# Altium PCB PCB1.PcbDoc
Units mm, origin at the board's own origin, x right, y up, seen from the top; angles counter-clockwise.
Board outline 38 x 21.7 mm, 2 copper layers (Top Layer, Bottom Layer); 45 components, 33 nets, 183 pads, 30 vias.
Unrouted connection lines stored in the file: 2.
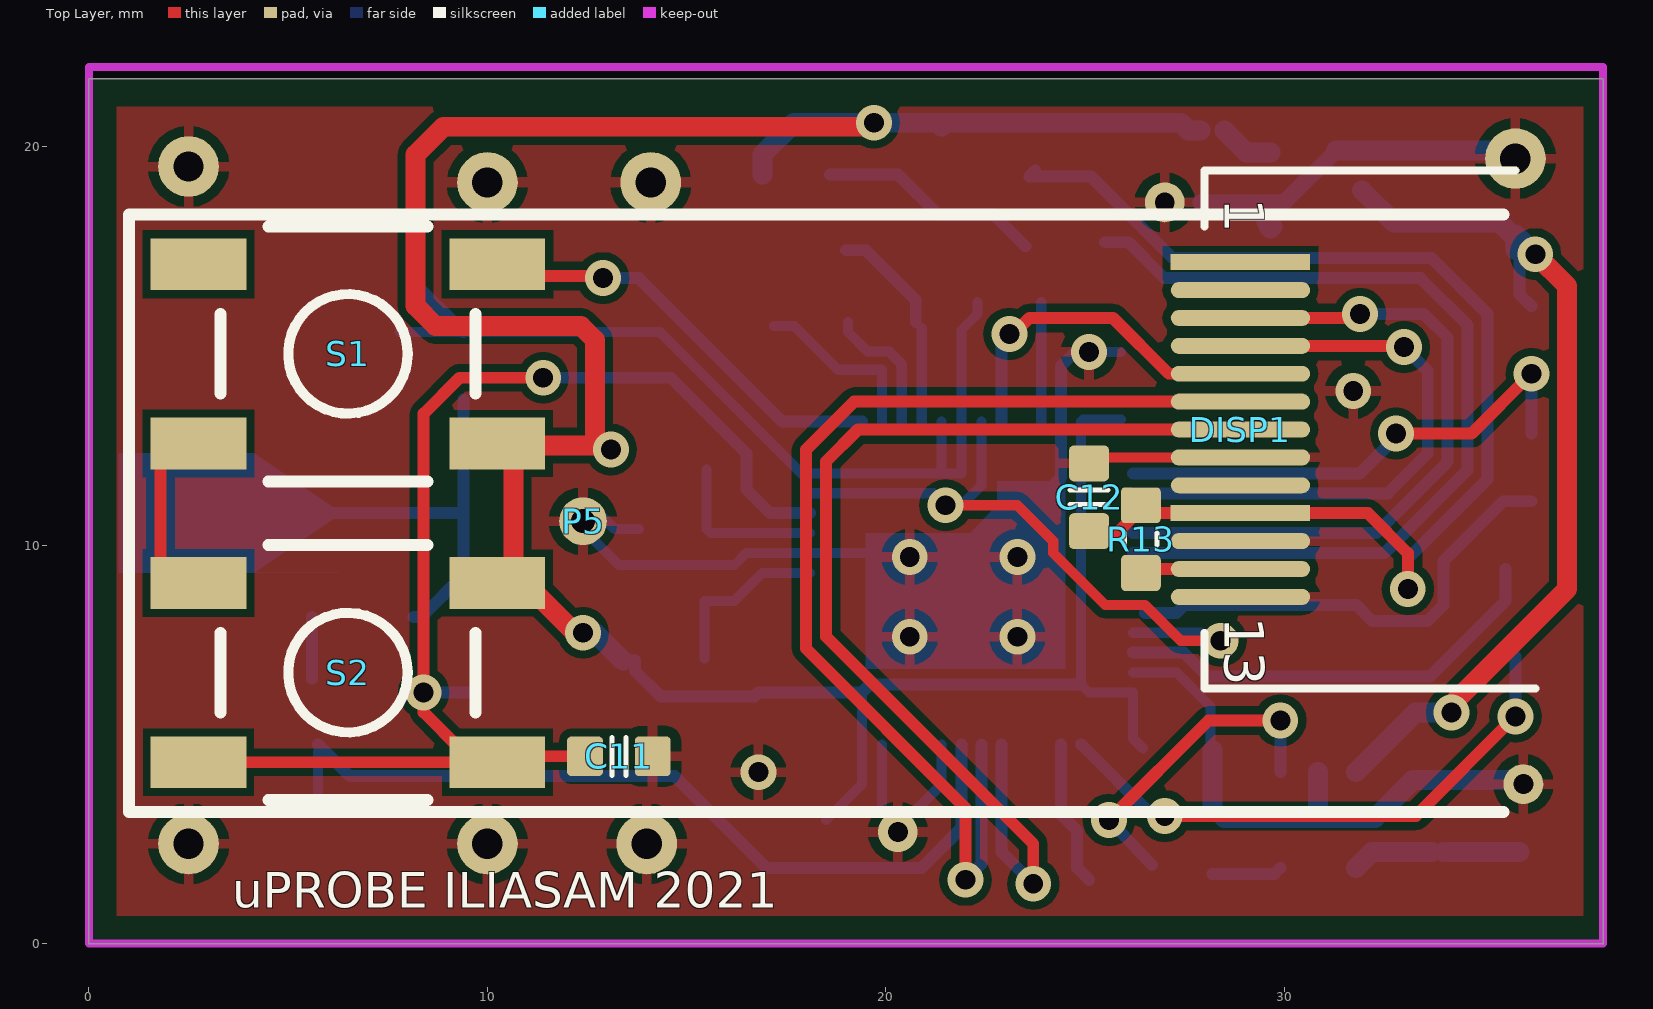
[diagram p0: Top Layer view]
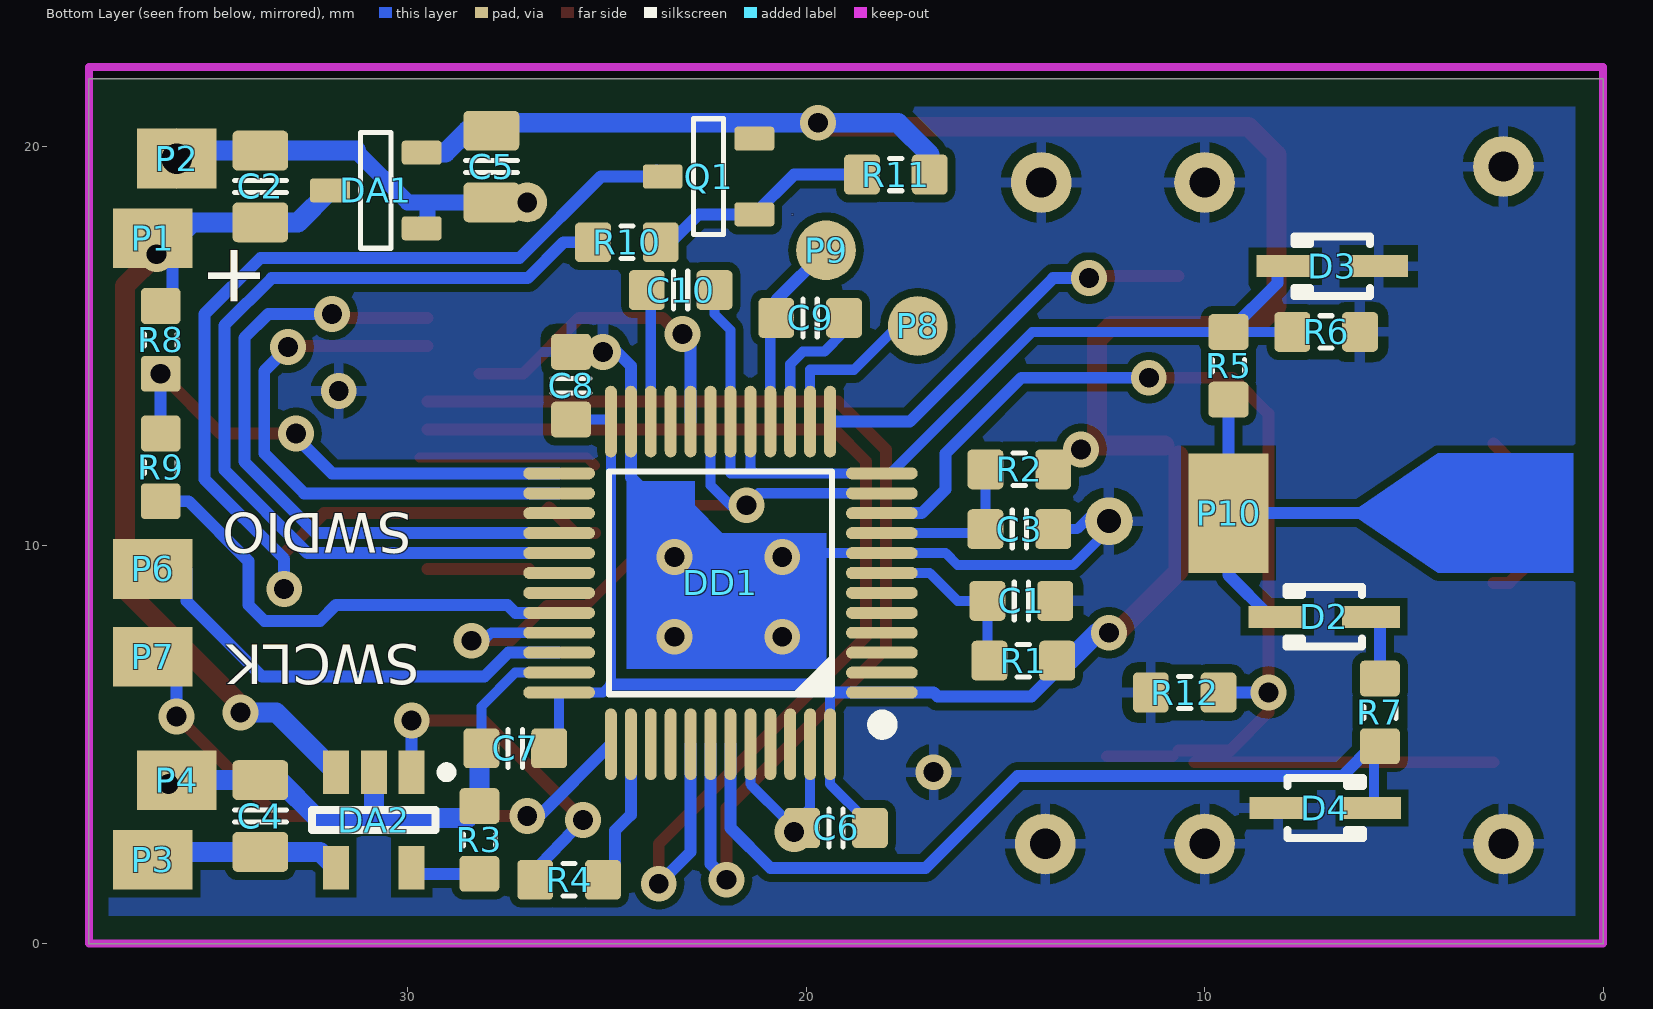
[diagram p1: Bottom Layer view, seen from below]
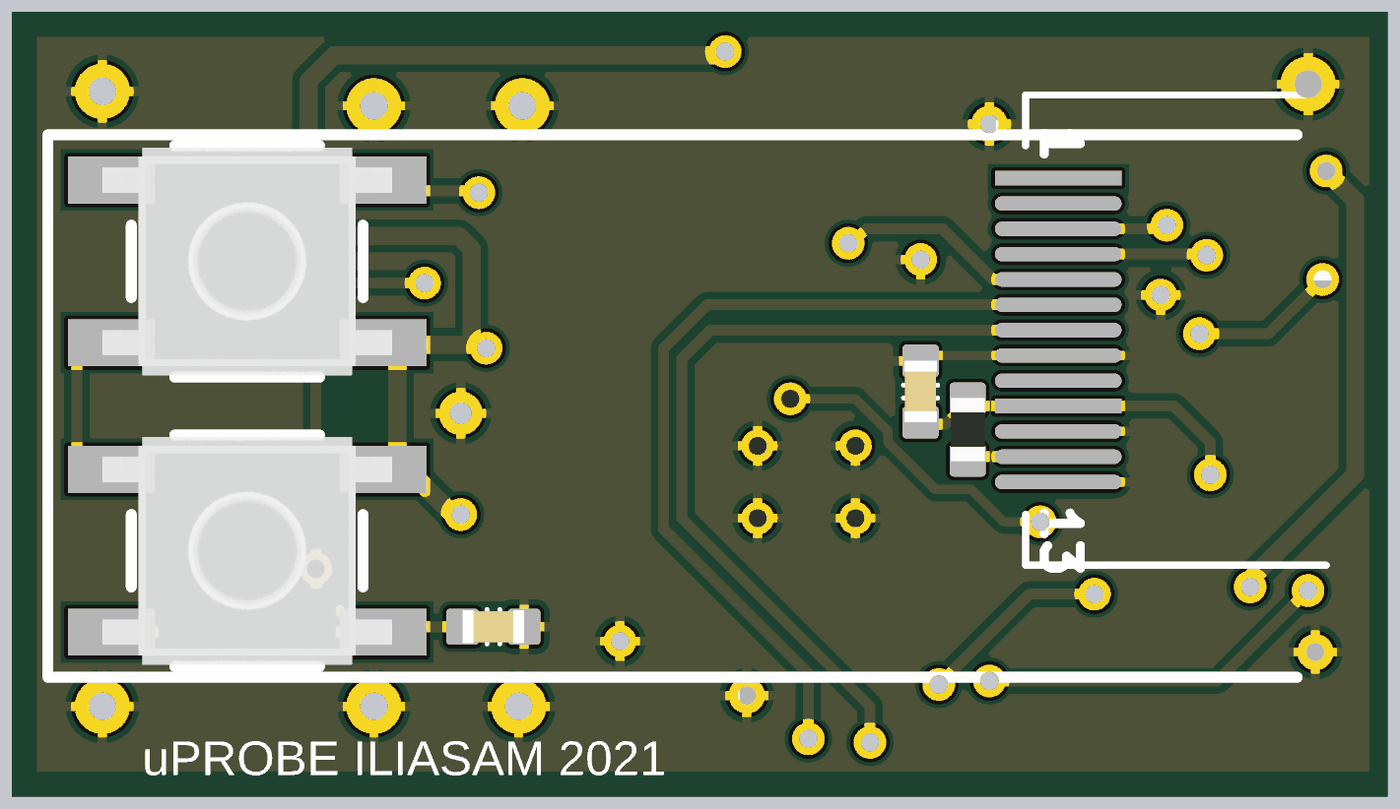
[diagram p2: 3D render of the assembled board from above, using the file's embedded part models]
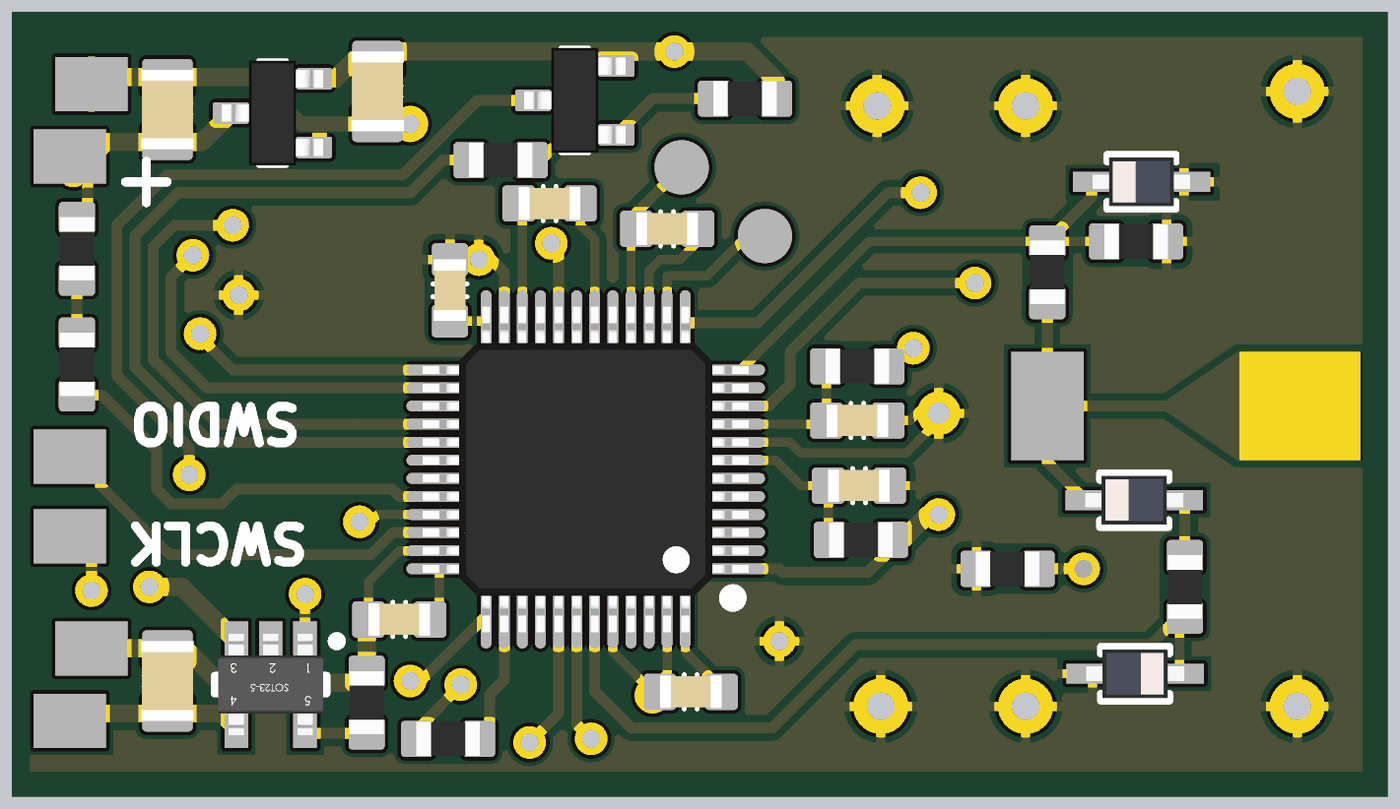
[diagram p3: 3D render of the assembled board from below, using the file's embedded part models]

## Layer stack, top to bottom
Top Solder: solder mask 0.0102, Solder Resist, Dk 3.5
Top Layer: signal copper 0.0356
Dielectric 1: dielectric 0.32, FR-4, Dk 4.8
Bottom Layer: signal copper 0.0356
Bottom Solder: solder mask 0.0102, Solder Resist, Dk 3.5

## Board outline
0,0 38,0 38,21.7 0,21.7

## Design rules (kind name [scope] priority, off if disabled: settings)
Clearance [All] p1: gap=0.2
ComponentClearance [All] p1: gap=0.2 collisioncheckmode=3 verticalgap=0.254 showdistances=FALSE
HoleSize [All] p1: absolutevalues=TRUE maxlimit=10 minlimit=0.3 maxpercent=80.000 minpercent=20.000
PolygonConnect [All] p1: connectstyle=Relief reliefconductorwidth=0.254 reliefentries=4 polygonreliefangle="90 Angle" airgapwidth=0.254
RoomDefinition Sheet1 [InComponentClass('Sheet1')] p1: confinementstyle=ConfineIn formatcopy=TRUE lockcomponents=FALSE outline -18.286,-22.225 40.769,-22.225 40.769,-10.541 -18.286,-10.541
RoutingVias [All] p1: holewidth=0.5 width=0.9 viastyle="Through Hole" minholewidth=0.4 minwidth=0.7 maxholewidth=10 maxwidth=12
SilkToSilkClearance [All] p1: silktosilkclearance=0.1
SolderMaskExpansion [All] p1: expansion=0.102
Width [All] p1: maxlimit=10 minlimit=0.2 preferedwidth=0.3
27 further rules are at their usual default settings.

## Components (designator, comment, footprint, x,y, rotation, side; value= is the part's Value field where it differs from the comment)
C1 "100nF" CAPC1608X90N 14.6,8.6 r0 bottom
C2 "2.2uF" CAPC2012X135N 33.7,19 r90 bottom
C3 "100nF" CAPC1608X90N 14.65,10.4 r0 bottom
C4 "4.7uF" CAPC2012X135N 33.7,3.2 r270 bottom
C5 "1uF" CAPC2012X135N 27.9,19.5 r90 bottom
C6 "100nF" CAPC1608X90N 19.25,2.9 r180 bottom
C7 "100nF" CAPC1608X90N 27.3,4.9 r180 bottom
C8 "100nF" CAPC1608X90N 25.9,14 r270 bottom
C9 "10pF" CAPC1608X90N 19.9,15.7 r180 bottom
C10 "22nF" CAPC1608X90N 23.15,16.4 r0 bottom
C11 "100nF" CAPC1608X90N 13.3,4.7 r0 top
C12 "100nF" CAPC1608X90N 25.1,11.2 r90 top
D2 "pmeg4005aea" SOD-323F/SC-90_INV 7,8.2 r180 bottom
D3 "BZX384-C4V7.115" SOD-323F/SC-90_INV 6.8,17 r180 bottom
D4 "pmeg4005aea" SOD-323F/SC-90_INV 6.975,3.4 r0 bottom
DA1 "MCP1702T" SOT23-3 30.8,18.9 r0 bottom
DA2 "MCP73831" SOT23-5 30.85,3.1 r270 bottom
DD1 "STM32F303CBT6" LQFP-48_N 22.15,9.05 r0 bottom locked
DISP1 "LCD 160x80" LCD_160_80 28.9,17.1 r270 top
P1 "PWR" EXT_PAD_2 37.9,17.7 r90 bottom
P2 "GND" EXT_PAD_2 34.3,19.7 r270 bottom
P3 "EXT_PWR" EXT_PAD_2 34.9,2.1 r270 bottom
P4 "GND" EXT_PAD_2 34.3,4.1 r270 bottom
P5 "AGND" EXT_HOLE 12.4,10.6 r0 top
P6 "Pad" EXT_PAD_2 34.9,9.4 r270 bottom
P7 "Pad" EXT_PAD_2 34.9,7.2 r270 bottom
P8 "DAC1" EXT_PAD_SMALL 17.2,17 r180 bottom
P9 "Pad" EXT_PAD_SMALL 19.5,18.9 r180 bottom
P10 "SIGNAL" EXT_PAD 9.4,9.3 r0 bottom
Q1 "IRLML6402" SOT23-3 22.45,19.25 r0 bottom
R1 "10K" RESC1608X55N 14.55,7.1 r0 bottom
R2 "100" RESC1608X55N 14.65,11.9 r180 bottom
R3 "2K" RESC1608X55N 28.2,2.6 r90 bottom
R4 "2K" RESC1608X55N 25.95,1.6 r0 bottom
R5 "100K" RESC1608X55N 9.4,14.5 r90 bottom
R6 "10K" RESC1608X55N 6.95,15.35 r180 bottom
R7 "1K" RESC1608X55N 5.6,5.8 r270 bottom
R8 "100K" RESC1608X55N 36.2,15.15 r270 bottom
R9 "100K" RESC1608X55N 36.2,11.95 r270 bottom
R10 "1K" RESC1608X55N 24.5,17.6 r180 bottom
R11 "100K" RESC1608X55N 17.75,19.3 r180 bottom
R12 "10K" RESC1608X55N 10.5,6.3 r0 bottom
R13 "82" RESC1608X55N 26.4,10.15 r270 top
S1 "SWT-6" BUTTON_B3FS 6.5,14.8 r180 top locked
S2 "SWT-6" BUTTON_B3FS 6.5,6.8 r0 top locked

## Footprints (in the part's own frame and the unit in brackets; to place one, negate y for a bottom-side part, rotate by r counter-clockwise, add the part's x,y. Pads: shape width x height; smd on the part's side, far side on the other; paste and mask are expansions set on the pad)
BUTTON_B3FS [mm] "Button with 4 pins"
  rect 2.4x1.3 smd: 1(-3.75,2.25) 2(-3.75,-2.25) 3(3.75,-2.25) 4(3.75,2.25)
  silkscreen extent -3.2,-3.2 3.2,3.2, body extent -4,-3.15 4,3.15, height 5.6
CAPC1608X90N [mm] "Chip Capacitor, Body 1.6x0.8mm, EIA 0603, IPC Medium Density"
  round 0.254 on Mech15: 0(0,0)
  rrect25% 0.9x1 smd: 1(-0.85,0) 2(0.85,0)
  Top Layer pour cut-out: -0.6,0.5 -0.4,0.7 0.4,0.7 0.6,0.5 0.6,-0.5 0.4,-0.7 -0.4,-0.7 -0.6,-0.5
  silkscreen extent -0.18,-0.48 0.18,0.48, body extent -0.85,-0.45 0.85,0.45, height 0.89
CAPC2012X135N [mm] "Chip Capacitor, Body 2.0x1.2mm, EIA 0805, IPC Medium Density"
  round 0.254 on Mech15: 0(0,0)
  rrect25% 1x1.4 smd: 1(-0.9,0) 2(0.9,0)
  Top Layer pour cut-out: -0.675,0.7 -0.475,0.9 0.475,0.9 0.675,0.7 0.675,-0.7 0.475,-0.9 -0.475,-0.9 -0.675,-0.7
  silkscreen extent -0.15,-0.65 0.15,0.65, body extent -1.1,-0.72 1.1,0.73, height 1.34
EXT_HOLE [mm] "Hole for wire (0.6)"
  round 1.2 hole 0.6: 1(0,0)
EXT_PAD [mm] "Pad for wire(3x2)"
  rect 2x3 smd: 1(0,-1.5)
EXT_PAD_2 [mm] "Pad for wire(1.5x2)"
  rect 1.5x2 smd: 1(0,-1.5)
EXT_PAD_SMALL [mm] "Pad for wire(1.5mm round)"
  round 1.5 smd: 1(0,-1.5)
LCD_160_80 [mm]
  rect 0.4x3.5 smd: 1(0,0) 10(6.3,0)
  oval 0.4x3.5 smd: 2(0.7,0) 3(1.4,0) 4(2.1,0) 5(2.8,0) 6(3.5,0) 7(4.2,0) 8(4.9,0) 9(5.6,0) 11(7,0) 12(7.7,0) 13(8.4,0)
  silkscreen extent -2.3,-0.9 10.7,7.4
LQFP-48_N [mm] "Thin QFP, 48-Leads, Body 7x7mm, Pitch 0.5mm, IPC Medium Density"
  round 1 on Mech15: 0(0,0)
  oval 1.8x0.3 smd: 1(-4.05,2.75) 2(-4.05,2.25) 3(-4.05,1.75) 4(-4.05,1.25) 5(-4.05,0.75) 6(-4.05,0.25) 7(-4.05,-0.25) 8(-4.05,-0.75) 9(-4.05,-1.25) 10(-4.05,-1.75) 11(-4.05,-2.25) 12(-4.05,-2.75) 25(4.05,-2.75) 26(4.05,-2.25) 27(4.05,-1.75) 28(4.05,-1.25) 29(4.05,-0.75) 30(4.05,-0.25) 31(4.05,0.25) 32(4.05,0.75) 33(4.05,1.25) 34(4.05,1.75) 35(4.05,2.25) 36(4.05,2.75)
  oval 0.3x1.8 smd: 13(-2.75,-4.05) 14(-2.25,-4.05) 15(-1.75,-4.05) 16(-1.25,-4.05) 17(-0.75,-4.05) 18(-0.25,-4.05) 19(0.25,-4.05) 20(0.75,-4.05) 21(1.25,-4.05) 22(1.75,-4.05) 23(2.25,-4.05) 24(2.75,-4.05) 37(2.75,4.05) 38(2.25,4.05) 39(1.75,4.05) 40(1.25,4.05) 41(0.75,4.05) 42(0.25,4.05) 43(-0.25,4.05) 44(-0.75,4.05) 45(-1.25,4.05) 46(-1.75,4.05) 47(-2.25,4.05) 48(-2.75,4.05)
  silkscreen extent -4.25,-2.79 2.79,3.75, body extent -4.5,-4.5 4.5,4.5, height 1.59
RESC1608X55N [mm] "Chip Resistor, Body 1.6x0.8mm, EIA 0603, IPC Medium Density"
  round 0.254 on Mech15: 0(0,0)
  rrect25% 0.9x1 smd: 1(-0.85,0) 2(0.85,0)
  Top Layer pour cut-out: -0.6,0.5 -0.4,0.7 0.4,0.7 0.6,0.5 0.6,-0.5 0.4,-0.7 -0.4,-0.7 -0.6,-0.5
  silkscreen extent -0.15,-0.41 0.15,0.41, body extent -0.87,-0.47 0.88,0.48, height 0.54
SOD-323F/SC-90_INV [mm] "Diode - inverted"
  rect 1.45x0.55 smd: 1(1.175,0) 2(-1.175,0)
  silkscreen extent -0.95,-0.75 0.95,0.75, body extent -1.35,-0.67 1.35,0.68, height 0.79
SOT23-3 [mm] "SOT23, 3 pin"
  round 0.5 on Mech15: 0(0,0)
  rrect25% 1x0.6 smd: 1(-1.15,0.95) 2(-1.15,-0.95) 3(1.15,0)
  silkscreen extent -0.38,-1.45 0.38,1.45, body extent -1.4,-1.45 1.4,1.45, height 1.29
SOT23-5 [mm] "SOT23, 5-Leads, Body 2.9x1.6mm, Pitch 0.95mm, Lead Span 2.8mm"
  rect 1.1x0.65 smd: 1(-1.2,0.95) 2(-1.2,0) 3(-1.2,-0.95) 4(1.2,-0.95) 5(1.2,0.95)
  silkscreen extent -1.32,-1.55 0.25,1.95, body extent -1.4,-1.45 1.4,1.45, height 1.14

## Part data
C1 C2 C3 C4 C5 C6 C7 C8 C9 C10 C11 C12: library part CC0805, "Chip capacitor"
D2 D4: library part "D Schottky", "Schottky Diode"
D3: library part "D Zener", "Zener Diode"
DA1: "Linear voltage regulator"
DA2: "Li-Ion Charger"
DD1: library part STM32F3_LQFP48, "Microcontroller"
DISP1: library part LCD_160x80
P1 P2 P3 P4 P6 P7 P8 P9 P10: library part "Ext Pad", "Pad for wire"
P5: library part "Hole Pad", "Hole Pad"
Q1: library part MOSFET_RZR025P01TL, "MOSFET SMD P-CH"
R1 R2 R3 R4 R5 R6 R7 R8 R9 R10 R11 R12 R13: library part RC0805, "Chip resistor"
S1 S2: "Switch"

## Free pads (board coordinates)
  round 1.524 hole 0.762: 2(35.8,19.7) 6(10,19.1) 7(14.1,19.1) 8(2.5,19.5) 9(2.5,2.5) 10(10,2.5) 12(14,2.5)
  round 1 hole 0.5: 3(27,18.6) 4(36,4)

## Via types
v1: diameter 0.9, hole 0.5, Top Layer to Bottom Layer, 29 vias
v2: diameter 1, hole 0.5, Top Layer to Bottom Layer, 1 vias

## Nets (pads, with @x,y where several pads share a name; then routed paths per layer and width w, separated by ;. In a path a pad name is that pad's centre, name@x,y a point inside that pad or via, vN(x,y) a via of type N, cw(c..) or ccw(c..) an arc to the next point about the centre after c; other vN are vias at no path point)
BAT_VOLT: DD1.25 R8.2 R9.1 | length 12.6
  Top Layer w0.3: v1(32.8,12.8) 34.7,12.8 v1(36.2,14.3)
  Bottom Layer w0.3: DD1.25 31.9,11.8 v1@32.85,12.75 ; R9.1 v1(36.2,14.3)
BTN2: DD1.13 S1.2 S1.3 | length 10.3
  Top Layer w0.3: S1.2@10.65,16.75 12.85,16.75 v1(12.9,16.7)
  Bottom Layer w0.3: v1(12.9,16.7) 13.8,16.7 17.4,13.1 DD1.13
CHARGE: DD1.38 R4.1 | length 3.7
  Bottom Layer w0.3: DD1.38 24.4,3.231 24.8,2.831 24.8,1.9 R4.1
COMP4_OUT: DD1.11 DD1.19 DD1.33 | length 17
  Top Layer w0.254: v1(21.5,11) 23.3,11 24.2,10.1 24.2,9.8 25.5,8.5 26.5,8.5 27.4,7.6 v1(28.4,7.6)
  Bottom Layer w0.254: DD1.11 21.2,11.3 v1(21.5,11) 21.9,11 22.4,11.5 DD1.19 ; DD1.33 27.9,7.8 28.1,7.6 v1(28.4,7.6)
COMP6_INP: C10.2 DD1.22 | length 3
  Bottom Layer w0.254: DD1.22 C10.2@23.9,16.1
DISP_OFF: DD1.29 R10.1 | length 22.9
  Bottom Layer w0.3: R10.1@25.5,17.6 26.091,17.6 26.991,16.7 33.414,16.7 34.6,15.514 34.6,11.886 32.514,9.8 DD1.29
DISP_PWR: C12.1 DISP1.10 Q1.3 R13.1 | length 30.3
  Top Layer w0.3: C12.1@25.3,10.3 25.8,10.3 26.45,10.95 26.6,10.8 32.1,10.8 33.1,9.8 v1(33.1,8.9)
  Bottom Layer w0.3: Q1.3@23.75,19.4 Q1.3 25.148,19.25 27.198,17.2 33.7,17.2 35.1,15.8 35.1,11.652 33.1,9.652 v1(33.1,8.9)
DIV_SIGNAL: C10.1 D3.2 DD1.12 DD1.17 DD1.18 R5.2 R6.1 | length 23.3
  Bottom Layer w0.254: R6.1 R5.2 14.325,15.35 DD1.12@17.875,11.8 ; DD1.12 21.3,11.8 ; DD1.17 21.4,11.9 21.3,11.8 ; C10.1@22.3,16.1 22.3,15.8 21.9,15.4 DD1.18 21.9,11.8 21.3,11.8
  Bottom Layer w0.3: D3.2@8.175,17 8.175,16.575 R5.2
EXT_PWR: C4.2 DA2.4 P3.1 | length 4
  Bottom Layer w0.5: DA2.4 32.2,2.3 C4.2 ; C4.2@34,2.3 P3.1@35.9,2.3
GND: C1.1 C2.2 C3.1 C4.1 C5.1 C6.1 C7.1 C8.1 C11.2 C12.2 D3.1 D4.1 DA1.1 DA2.2 DD1.8 DD1.23 DD1.35 DD1.44 DD1.47 DISP1.8 DISP1.11 DISP1.13 P2.1 P4.1 P5.1 pad.2 pad.3 pad.4 pad.6 pad.7 pad.8 pad.9 pad.10 pad.12 R3.2 R6.2 R12.2 | length 46.5
  Top Layer w0.254: C12.2@25.3,12 25.5,12.2 DISP1.8@29.7,12.2
  Bottom Layer w0.254: C3.1 13.2,10.4 12.8,10.8 12.4,10.8 12.4,10.4 13.3,9.5 16.2,9.5 16.5,9.8 DD1.8 20,9.8 ; DD1.47 19.9,3.4 20.2,3.1 20.5,3.1 21.4,4 DD1.44 ; v1@24.75,14.85 C8.1 ; DD1.35 27.3,6.8 28.15,5.95 C7.1
  Bottom Layer w0.3: 24.1,11.4 24.4,11.7 DD1.23 24.4,14.5 v1@24.75,14.85
  Bottom Layer w0.4: C5.1 29.5,18.6 ; DA1.1@29.5,18.1 29.5,18.6 ; 31.3,19.9 30,18.6 29.5,18.6
  Bottom Layer w0.5: R3.2 C7.1@28.2,4.85 ; R3.2@28.5,3.15 30.85,3.15 ; DA1.1@29.6,18 DA1.1 DA1.1@29.7,18 ; DA2.2 30.85,3.15 ; 31.3,19.9 C2.2 P2.1@35.6,19.9 ; P4.1 C4.1 33.225,4.1 32.275,3.15 30.85,3.15
  other v1: 16.8,4.3 20.6,7.7 23.3,7.7 20.6,9.7 23.3,9.7 31.731,13.869 25.1,14.85
  other v2: 20.3,2.8
MEAS_GND: DD1.32 R9.2 | length 11.8
  Bottom Layer w0.3: DD1.32@26.5,8.3 27.3,8.3 27.5,8.5 31.8,8.5 32.2,8.1 33.6,8.1 34,8.5 34,9.6 35.5,11.1 R9.2
NetC3_2: C3.2 DD1.9 R2.1 | length 4
  Bottom Layer w0.254: C3.2 R2.1 ; C3.2@15.6,10.3 DD1.9
NetD2_1: D2.1 R7.1 | length 1.5
  Bottom Layer w0.3: R7.1 D2.1@5.6,8.2
NetDA2_1: DA2.1 R4.2 | length 8.3
  Top Layer w0.3: v1(25.6,3.1) 28.1,5.6 v1(29.9,5.6)
  Bottom Layer w0.3: R4.2@26.675,1.975 v1(25.6,3.1) ; DA2.1 v1(29.9,5.6) ; v1(25.6,3.1) 25.6,3.05 v1(25.6,3.1)
NetDA2_5: DA2.5 R3.1 | length 1.8
  Bottom Layer w0.3: R3.1 29.75,1.75 DA2.5
NetDD1_14: DD1.14 P8.1 | length 4.5
  Bottom Layer w0.254: P8.1 17.7,15.5 18.8,14.4 19.9,14.4 DD1.14
NetDISP1_12: DISP1.12 R13.2 | length 2.5
  Top Layer w0.3: 26.95,9.4 DISP1.12@29.5,9.4
NetQ1_1: Q1.1 R10.2 R11.1 | length 5.6
  Bottom Layer w0.3: R11.1 20.3,19.3 Q1.1 22.7,18.3 R10.2@23.5,17.5
NRST: C1.2 DD1.7 R1.2 | length 4.4
  Bottom Layer w0.254: R1.2@15.45,7.15 C1.2 16.2,8.6 16.9,9.3 DD1.7
OPAMP2_NEG: C9.2 DD1.15 | length 3.4
  Bottom Layer w0.254: C9.2@19.05,15.6 19.05,15.35 19.546,14.854 20.088,14.854 20.4,14.542 DD1.15
OPAMP2_OUT: C9.1 DD1.16 P9.1 | length 5.2
  Bottom Layer w0.254: DD1.16 C9.1@20.9,15.45
  Bottom Layer w0.3: P9.1@19,17.4 P9.1 20.75,16.15 C9.1@20.75,15.6
SIGNAL: D2.2 P10.1 R5.1 | length 9.7
  Bottom Layer w0.3: 5.8,10.8 P10.1 ; D2.2@8.15,8.2 8.35,8.2 9.4,9.25 P10.1 ; R5.1 P10.1
SPI_CLK: DD1.26 DISP1.4 | length 14.2
  Top Layer w0.3: DISP1.4@29.5,15 32.965,15 32.996,14.969 v1(33,14.969)
  Bottom Layer w0.3: DD1.26 32.6,11.3 33.6,12.3 33.6,14.369 v1(33,14.969)
SPI_CSN: DD1.41 DISP1.7 | length 27.9
  Top Layer w0.3: v1(23.7,1.5) 23.7,2.5 18.5,7.7 18.5,12.1 19.3,12.9 DISP1.7@29.5,12.9
  Bottom Layer w0.3: DD1.41 22.9,3.131 22.9,2.3 v1(23.7,1.5)
SPI_DCN: DD1.20 DISP1.5 | length 8.3
  Top Layer w0.3: v1(23.1,15.3) 23.1,15.2 23.6,15.7 25.7,15.7 27.1,14.3 DISP1.5@28.2,14.3
  Bottom Layer w0.3: DD1.20 22.9,15.1 v1(23.1,15.3)
SPI_MOSI: DD1.28 DISP1.3 | length 16.7
  Top Layer w0.3: DISP1.3@29.5,15.7 v1@32,15.7
  Bottom Layer w0.3: DD1.28 32.307,10.3 34.1,12.093 34.1,15.2 33.5,15.8 v1(31.9,15.8)
SPI_RESN: DD1.42 DISP1.6 | length 28
  Top Layer w0.3: v1(22,1.6) 22,3.4 18,7.4 18,12.4 19.2,13.6 DISP1.6@29.5,13.6
  Bottom Layer w0.3: v1(22,1.6) 22.4,2 22.4,3.338 DD1.42
SWCLK: DD1.37 P7.1 | length 14.2
  Top Layer w0.3: v1(27,3.2) 33.3,3.2 v1(35.8,5.7)
  Bottom Layer w0.3: DD1.37 26.7,3.2 v1(27,3.2) ; v1(35.8,5.7) P7.1@35.8,7.2
SWDIO: DD1.34 P6.1 | length 11.2
  Bottom Layer w0.3: DD1.34 27.475,7.3 28.075,6.7 33.655,6.7 35.55,8.595 P6.1@35.55,9.4
TEST_SIG: D4.2 DD1.43 R7.2 | length 21.2
  Bottom Layer w0.254: D4.2@5.75,3.5 R7.2@5.75,4.8
  Bottom Layer w0.3: R7.2@5.75,5 6.55,4.2 14.7,4.2 17,1.9 20.9,1.9 21.9,2.9 21.9,3.546 DD1.43
VBAT: C2.1 DA1.3 DA2.3 P1.1 R8.1 | length 23.8
  Top Layer w0.5: v1(34.2,5.8) 34.2,6 37.1,8.9 37.1,16.5 v1(36.3,17.3)
  Bottom Layer w0.3: P1.1@35.9,17.405 35.9,16.3 R8.1 ; P1.1@36.2,17.1 P1.1@36.3,17.2
  Bottom Layer w0.5: DA2.3 33.3,5.8 v1(34.2,5.8) ; DA1.3 32.75,18.1 C2.1 35.4,18.1 P1.1@35.8,17.7 ; P1.1@35.8,17.405 P1.1@35.8,17.7 ; P1.1@35.8,17.8 v1(36.3,17.3) ; P1.1@36.3,17.2 P1.1@35.8,17.7
VCC: C5.2 C6.2 C7.2 C8.2 DA1.2 DD1.1 DD1.24 DD1.36 DD1.48 Q1.2 R1.1 R2.2 R11.2 S1.1 S1.4 S2.1 S2.4 | length 75.9
  Top Layer w0.3: S2.1 2.35,9.05 1.8,9.6 1.8,12.1 2.3,12.1 S1.4 ; v1@12.2,7.8 v1(12.4,7.8) ; v1@12.95,12.25 v1(13.1,12.4)
  Top Layer w0.5: S1.1@10.65,12.25 10.65,9.35 v1@12.2,7.8 ; S1.1@11,12.5 12.7,12.5 12.7,15.149 12.349,15.5 8.7,15.5 8.2,16 8.2,19.8 8.9,20.5 v1@19.6,20.5
  Bottom Layer w0.254: C6.2@18.5,3.1 19.4,4 DD1.48 19.4,6.3 ; DD1.24 24.9,6.5 25.1,6.3 DD1.36 26.2,5.15 C7.2 ; DD1.24@24.95,13.15 C8.2
  Bottom Layer w0.3: v1(12.4,7.8) v1@12.7,7.8 ; R1.1@13.4,7.1 R1.1 13.7,6.85 14.35,6.2 16.7,6.2 16.8,6.3 DD1.1 19.4,6.3 19.6,6.5 24.9,6.5
  Bottom Layer w0.5: v1@12.7,7.8 R1.1@13.4,7.1 ; R11.2 16.9,19.8 17.7,20.6 v1(19.7,20.6) 21.5,20.6 ; Q1.2@21.4,20.5 21.5,20.6 ; C5.2 27.6,20.4 27.4,20.6 21.5,20.6 ; C5.2@28.5,20.4 29.05,19.85 DA1.2
WAKEUP: C11.1 DD1.10 R12.1 S2.2 S2.3 | length 32.4
  Top Layer w0.3: S2.2 S2.3 ; S2.3@10.65,4.85 9.35,4.85 8.4,5.8 v1(8.4,6.3) 8.4,13.3 9.3,14.2 v1(11.4,14.2) ; S2.3@10.8,4.7 C11.1
  Bottom Layer w0.3: v1(8.4,6.3) R12.1@9.5,6.3 ; v1(11.4,14.2) 14.6,14.2 16.5,12.3 16.5,11.4 17.1,10.8 DD1.10
pads on no net: C1.0 C2.0 C3.0 C4.0 C5.0 C6.0 C7.0 C8.0 C9.0 C10.0 C11.0 C12.0 DA1.0 DD1.0 DD1.2 DD1.3 DD1.4 DD1.5 DD1.6 DD1.21 DD1.27 DD1.30 DD1.31 DD1.39 DD1.40 DD1.45 DD1.46 DISP1.1 DISP1.2 DISP1.9 Q1.0 R1.0 R2.0 R3.0 R4.0 R5.0 R6.0 R7.0 R8.0 R9.0 R10.0 R11.0 R12.0 R13.0

## Polygon pours and split planes (outlines as drawn)
GND on Top Layer "GND_TOP" (solid, remove dead copper, pour order 0): 0.7,21 0.7,0.7 37.5,0.7 37.5,21
GND on Bottom Layer "GND_BOTTOM" (solid, remove dead copper, pour order 2): 0.7,21 0.7,0.7 37.5,0.7 37.5,21

## Keep-outs
Keep-Out Layer:
  lines w0.2: 0,0 0,22 38,22 38,0 0,0

## Other copper
Bottom Layer:
  region net GND: 19.5,10.3 22.1,10.3 22.8,11 22.8,11.6 24.5,11.6 24.5,6.9 19.5,6.9
  region net SIGNAL: 0.75,12.3 4.15,12.3 6.35,10.8 4.15,9.3 6.25,9.3 0.75,9.3

## Silkscreen, mask and mechanical layers (free items; w line width, h text height)
Top Overlay:
  lines w0.3: 35.5,3.3 1,3.3 1,18.3 35.5,18.3
  text "uPROBE ILIASAM 2021" at 3.6,0.6 h1.52
Bottom Overlay:
  text "+" at 33.7,15.9 h1.5 r270
  text "SWDIO" at 29.9,10.8 h1 r180
  text "SWCLK" at 29.7,7.5 h1 r180
Bottom Solder:
  region: 0.7,12.3 4.1,12.3 4.1,9.3 0.7,9.3

## Text inside footprints (layer, text, board x,y; h text height)
DISP1: Top Overlay "13" at 28.5,8.2 h1 r270; Top Overlay "1" at 28.5,18.7 h1 r270